# Altium PCB PCB1.PcbDoc
Units mm, origin at the board's own origin, x right, y up, seen from the top; angles counter-clockwise.
Board outline 43.6 x 30.7 mm, 2 copper layers (Top Copper, Bottom Copper), stack 1.335 mm thick; 21 components, 10 nets, 63 pads, 76 vias.
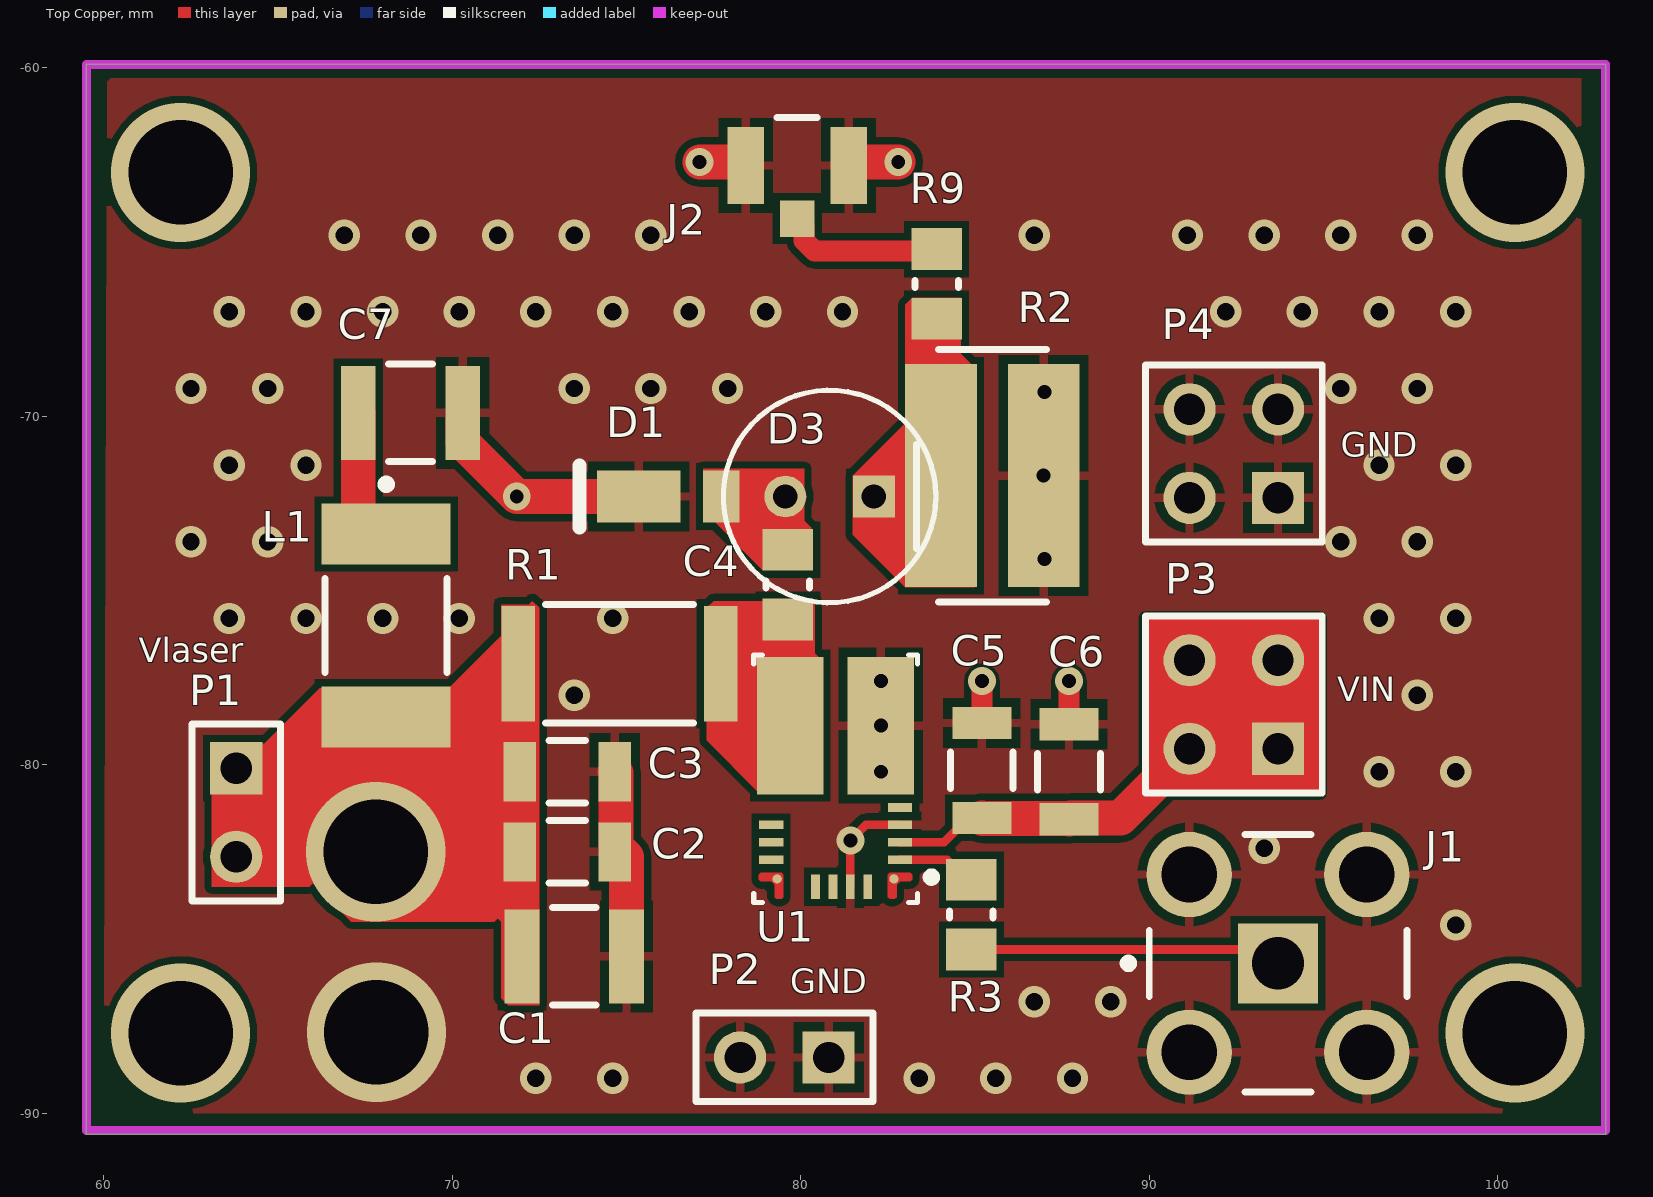
[diagram p0: Top Copper view]
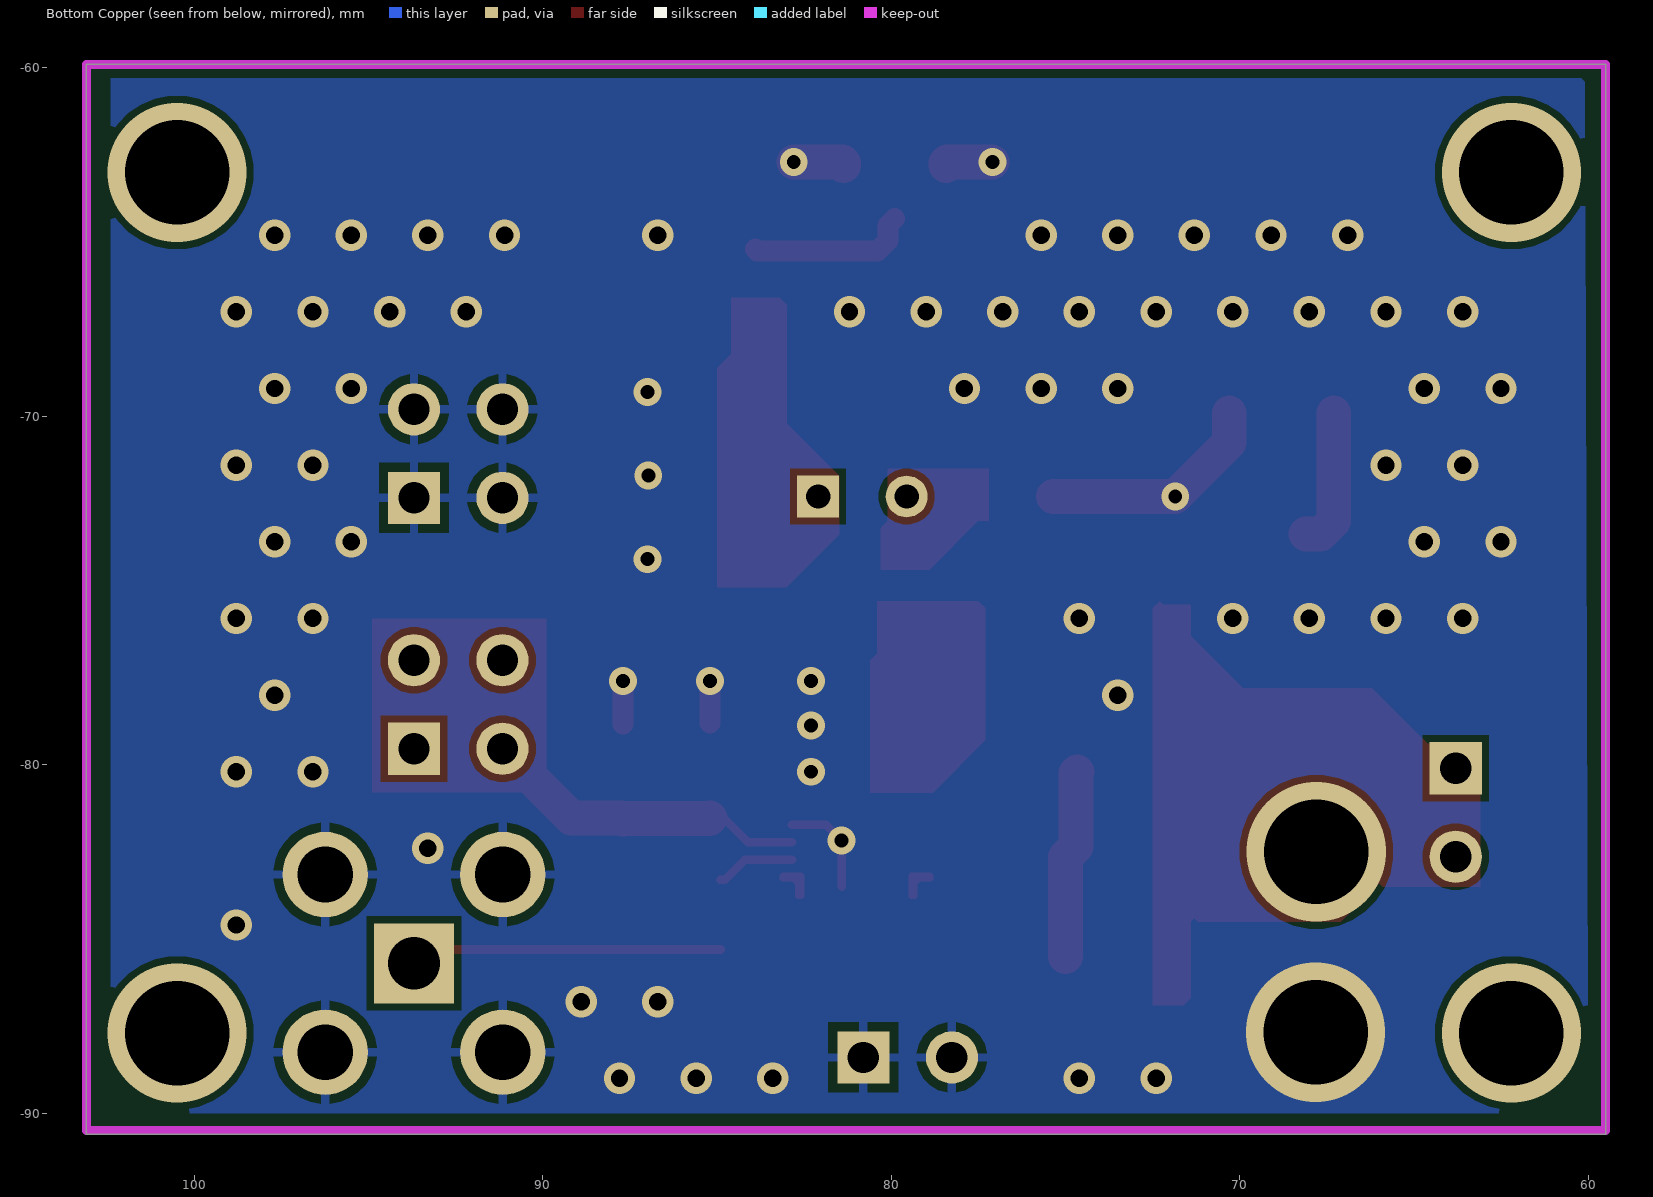
[diagram p1: Bottom Copper view, seen from below]

## Layer stack, top to bottom
Top Mask: solder mask 0.015, Solder Resist, Dk 3.8
Top Copper: signal copper 0.035
Core: core 1.265, FR-4, Dk 4.5
Bottom Copper: signal copper 0.035
Bottom Mask: solder mask 0.015, Solder Resist, Dk 3.8

## Board outline
59.5,-59.9 103.1,-59.9 103.1,-90.6 59.5,-90.6

## Design rules (kind name [scope] priority, off if disabled: settings)
Clearance Clearance_3 [InNamedPolygon('GND_L03_P003')] p1: gap=0.3 ignorepadtopadclearanceinfootprint=FALSE except(0.254: Arc-Text Arc-Hole Track-Text Track-Hole SMDPad-Text SMDPad-Hole THPad-THPad THPad-Via THPad-Text THPad-Hole Via-Via Via-Text Via-Hole Fill-Text Fill-Hole Poly-Text Poly-Hole Region-Text Region-Hole Text-Text Text-Hole)
Clearance 0.3 [InNamedPolygon('GND_L03_P002')] p2: gap=0.3 ignorepadtopadclearanceinfootprint=FALSE except(0.254: Arc-Via Arc-Text Arc-Hole Track-Via Track-Text Track-Hole SMDPad-Via SMDPad-Text SMDPad-Hole THPad-THPad THPad-Via THPad-Text THPad-Hole Via-Via Via-Text Via-Hole Fill-Text Fill-Hole Poly-Text Poly-Hole Region-Text Region-Hole Text-Text Text-Hole)
Clearance Clearance_2 [InNamedPolygon('GND_L04_P001')] p3: gap=0.3 ignorepadtopadclearanceinfootprint=FALSE except(0.254: Arc-Via Arc-Text Arc-Hole Track-Via Track-Text Track-Hole SMDPad-Via SMDPad-Text SMDPad-Hole THPad-THPad THPad-Via THPad-Text THPad-Hole Via-Via Via-Text Via-Hole Fill-Text Fill-Hole Poly-Text Poly-Hole Region-Text Region-Hole Text-Text Text-Hole)
Clearance Clearance_1 [InNamedPolygon('GND_L01_P000')] p4: gap=0.3 ignorepadtopadclearanceinfootprint=FALSE except(0.254: Arc-Via Arc-Text Arc-Hole Track-Via Track-Text Track-Hole SMDPad-Via SMDPad-Text SMDPad-Hole THPad-Via THPad-Text THPad-Hole Via-Via Via-Text Via-Hole Fill-Text Fill-Hole Poly-Text Poly-Hole Region-Text Region-Hole Text-Text Text-Hole)
Clearance [All] p5: gap=0.2 ignorepadtopadclearanceinfootprint=FALSE
ComponentClearance [All] p1 off: gap=0.254 collisioncheckmode=3 verticalgap=0.254 showdistances=FALSE
DiffPairsRouting [All] p1 off: maxlimit=0.254 minlimit=0.254 mostfreqgap=0.3 toplayer_minwidth=0.2 toplayer_maxwidth=0.5 toplayer_prefwidth=0.3 bottomlayer_minwidth=0.2 bottomlayer_maxwidth=0.5 bottomlayer_prefwidth=0.3 maxuncoupledlength=0.2
HoleSize [All] p1: absolutevalues=TRUE maxlimit=10 minlimit=0.3 maxpercent=80.000 minpercent=20.000
MinimumAnnularRing [All] p1: minimumring=0.19
MinimumSolderMaskSliver [All] p1: minsoldermaskwidth=0
PolygonConnect [HasFootprint('FP-LLL215-0_1-IPC_B')] p1: connectstyle=Direct reliefconductorwidth=0.254 reliefentries=4 polygonreliefangle="90 Angle" airgapwidth=0.254
PolygonConnect PolygonConnectGND2 [IsVia] p2: connectstyle=Direct reliefconductorwidth=0.254 reliefentries=4 polygonreliefangle="90 Angle" airgapwidth=0.254
PolygonConnect PolygonConnectGND [InNet('GND')] p3: connectstyle=Relief reliefconductorwidth=0.254 reliefentries=4 polygonreliefangle="90 Angle" airgapwidth=0.254
RoomDefinition Sheet1 [InComponentClass('Sheet1')] p1: confinementstyle=ConfineIn formatcopy=TRUE lockcomponents=FALSE outline 115.1,-108.8 124.9,-108.8 124.9,-103.7 115.1,-103.7
RoutingVias [All] p1: holewidth=0.5 width=0.9 viastyle="Through Hole" minholewidth=0.3 minwidth=0.6 maxholewidth=10 maxwidth=12
SilkToSilkClearance [All] p1: silktosilkclearance=0.1
SolderMaskExpansion [All] p1: expansion=0.102 istentingtop=FALSE
SupplyNets "Schematic Supply Nets_6" [InNet('GND')] p1: voltage=0.000
SupplyNets "Schematic Supply Nets_5" [InNet('Vin')] p2: voltage=0.000
SupplyNets "Schematic Supply Nets_4" [InNet('Vlaser1')] p3: voltage=0.000
Width [All] p1: maxlimit=10 minlimit=0.2 preferedwidth=0.6 toplayer_minwidth=0.25 toplayer_maxwidth=1 bottomlayer_prefwidth=0.3 minimp=50.000000 maximp=50.000000 favimp=50.000000
25 further rules are at their usual default settings.

## Components (designator, comment, footprint, x,y, rotation, side; value= is the part's Value field where it differs from the comment)
C1 "CC1210KKX7R9BB105" FP-CC1210-GA-MFG 73.5,-85.5 r0 top value=1uF
C2 "1 uF" FP-CL31B106KBHNNNE-MFG 73.3,-82.5 r180 top value=10uF
C3 "100 nF" FP-CL31B106KBHNNNE-MFG 73.3,-80.2 r180 top value=10uF
C4 "20nF" RESC2013X60X35ML10T20 79.63,-74.83 r270 top
C5 "10uF" FP-CL31B106KBHNNNE-MFG 85.2,-80.162 r270 top
C6 "1uF" FP-CL31B106KBHNNNE-MFG 87.7,-80.2 r270 top value=10uF
C7 "CC1210KKX7R9BB105" FP-CC1210-GA-MFG 68.8,-69.9 r180 top value=1uF
D1 "DFLS1100-7" DIOD-POWERDI123-2_V 76.2,-72.3 r180 top
D3 "Light-Emitting Diode" FP-DPGEW1S09H-MFG 80.83,-72.3 r180 top locked
J1 "RF2-04A-T-00-50-G" FP-RF2-04A-T-00-50-G-MFG 93.7,-85.7 r0 top
J2 "U.FL-R-SMT(10)" FP-U_FL-R-SMT_10-MFG 79.9,-62.8 r180 top
L1 "FBMH4532HM132-T" TAYO-FBMH4532-2_V 68.1,-76 r270 top
P1 "Header 2" HDR1X2 63.8,-80.1 r270 top
P2 "Header 2" HDR1X2 80.8,-88.4 r180 top
P3 "Header 2X2" HDR2X2 93.7,-79.54 r90 top
P4 "Header 2X2" HDR2X2 93.7,-72.34 r90 top
R1 "CRGP2512F390R" FP-CRGP2512-IPC_C 74.8,-77.1 r180 top value=390Ω
R2 "LTR100LJZPFSR015" FP-LTR100L-MFG 85.5,-71.7 r180 top
R3 "1K" RESC2013X60X35ML10T20 84.9,-84.3 r270 top
R9 "47" RESC2013X60X35ML10T20 83.9,-66.2 r90 top
U1 "XLMG3100R017VBER" VBE0015A-MFG 81,-80.4 r180 top

## Footprints (in the part's own frame and the unit in brackets; to place one, negate y for a bottom-side part, rotate by r counter-clockwise, add the part's x,y. Pads: shape width x height; smd on the part's side, far side on the other; paste and mask are expansions set on the pad)
DIOD-POWERDI123-2_V [mm] "SOD, 2-Leads, Body 2.8x1.78mm"
  rect 1.05x1.5 smd: 1(-1.525,0)
  rect 2.4x1.5 smd: 2(0.85,0)
  silkscreen extent 2.55,-0.89 2.55,0.89, body extent -1.4,-0.89 1.4,0.89, height 1.01
FP-CC1210-GA-MFG [mm]
  rect 1x2.7 smd paste+0 mask+0: 1(-1.5,0) 2(1.5,0)
  silkscreen extent -0.63,-1.4 0.63,1.4, body extent -2.2,-1.7 2.2,1.7, height 0.25
FP-CL31B106KBHNNNE-MFG [mm]
  rect 0.925x1.7 smd paste+0 mask+0: 1(-1.362,0) 2(1.363,0)
  silkscreen extent -0.53,-0.9 0.52,0.9, body extent -1.92,-1 1.92,1, height 0.25
FP-CRGP2512-IPC_C [mm]
  rect 0.958x3.306 smd paste+0 mask+0: 1(-2.902,0) 2(2.902,0)
  silkscreen extent -2.12,-1.7 2.12,1.7, body extent -3.48,-1.8 3.48,1.8, height 0.25
FP-DPGEW1S09H-MFG [mm]
  rect 1.2x1.2 hole 0.7 paste-2539.97 mask+0: 1(-1.27,0)
  round 1.2 hole 0.7 paste-2539.97 mask+0: 2(1.27,0)
  silkscreen extent -3.05,-3.05 3.05,3.05, body extent -3.15,-3.15 3.15,3.15, height 0.25
FP-LTR100L-MFG [mm]
  rect 2.06x6.4 smd paste+0 mask+0: 1(-1.475,0) 2(1.475,0)
  silkscreen extent -1.55,-3.62 1.55,3.62, body extent -2.61,-3.37 2.61,3.37, height 0.25
FP-RF2-04A-T-00-50-G-MFG [mm]
  rect 2.3x2.3 hole 1.5 paste-2539.97 mask+0: 1(0,0)
  round 2.45 hole 1.6 paste-2539.97 mask+0: 2(-2.55,2.55) 3(2.55,2.55) 4(-2.55,-2.55) 5(2.55,-2.55)
  silkscreen extent -4.42,-3.7 3.7,3.7, body extent -3.88,-3.88 3.88,3.88, height 0.25
FP-U_FL-R-SMT_10-MFG [mm]
  rect 1x1.05 smd paste-1000 mask+0: 1(0,1.525)
  rect 1.05x2.2 smd paste-1000 mask+0: 2(-1.475,0) 3(1.475,0)
  silkscreen extent -0.58,-1.38 0.58,-1.38, body extent -2.1,-1.48 2.1,2.15, height 0.25
HDR1X2 [mm] "Connector; Header; 2 Position"
  rect 1.5x1.5 hole 0.9: 1(0,0)
  round 1.5 hole 0.9: 2(2.54,0)
  silkscreen extent -1.27,-1.27 3.81,1.27
HDR2X2 [mm] "Connector; Header; 2x2 Position"
  rect 1.5x1.5 hole 0.9: 1(0,0)
  round 1.5 hole 0.9: 2(0,2.54) 3(2.54,0) 4(2.54,2.54)
  silkscreen extent -1.27,-1.27 3.81,3.81
RESC2013X60X35ML10T20 [mm] "Chip Resistor, 2-Leads, Body 2.1x1.35mm, IPC Low Density"
  rect 1.2x1.45 smd: 1(-1,0) 2(1,0)
  silkscreen extent -0.1,-0.62 0.1,0.62, body extent -1.05,-0.68 1.05,0.67, height 0.6
TAYO-FBMH4532-2_V [mm] "SMD, 2-Leads, Body 4.9x3.5mm, Height 3.5mm"
  rect 1.75x3.7 smd: 1(-2.625,0) 2(2.625,0)
  silkscreen extent -4.17,-1.75 1.35,1.75, body extent -2.45,-1.75 2.45,1.75, height 3.5
VBE0015A-MFG [mm]
  round 0.265 smd paste+0 mask-0.114: 1(-1.675,2.875) 11(1.675,2.875)
  rect 0.7x0.25 smd paste+0 mask-0.343: 2(-1.85,2.325) 3(-1.85,1.825) 4(-1.85,1.325) 5(-1.85,0.825) 8(1.85,1.325) 9(1.85,1.825) 10(1.85,2.325)
  rect 1.9x3.95 smd paste-1.962 mask-1.968: 6(-1.3,-1.525) 7(1.3,-1.525)
  rect 0.25x0.7 smd paste+0 mask-0.343: 12(0.575,3.1) 13(0.075,3.1) 14(-0.425,3.1) 15(-0.925,3.1)
  Top Copper region: 1.55,2.7 2.15,2.7 2.2,2.75 2.2,2.9 2.15,2.95 1.85,2.95 1.75,3.05 1.75,3.4 1.7,3.45 1.55,3.45 1.5,3.4 1.5,2.75
  Top Copper region: -1.55,2.7 -2.15,2.7 -2.2,2.75 -2.2,2.9 -2.15,2.95 -1.85,2.95 -1.75,3.05 -1.75,3.4 -1.7,3.45 -1.55,3.45 -1.5,3.4 -1.5,2.75
  silkscreen extent -2.88,-3.55 2.35,3.55

## Part data
C1 C7: library part CMP-03422-000918-1, "CAP CER 1UF 50V X7R 1210", Capacitance=1uF, Manufacturer=Yageo, Package=CC1210-GA, Temperature="-55°C to +125°C", Temperature Characteristic=X7R, Temperature Coefficient=15%, Temperature Range High=+125°C, Temperature Range Low=-55°C, Tolerance=10%, Voltage Rating=50V, Automotive=No, Category=Cap, ComponentLink2Description=Datasheet, ComponentLink2URL=http://www.yageo.com/documents/recent/UPY-GPHC_X7R_6.3V-to-50V_18.pdf, Device Class L1="Passive Components", Device Class L2=Capacitors, Device Class L3="Ceramic Capacitors", Digikey Description="CAP CER 1UF 50V X7R 1210", Footprint Url=http://www.yageo.com/exep/pages/download/literatures/UPY-C_GEN_24.pdf, Height=1.45mm, Ipc Land Pattern Name=CAPC320250X125, Lead Free=Yes, Manufacturer Part Number=CC1210KKX7R9BB105, Material=Ceramic, Mouser Description="1210 1 uF 50 V ±10 % Tolerance X7R SMT Multilayer Ceramic Capacitor", Octopart=https://octopart.com/cc1210kkx7r9bb105-yageo-22054290, RoHS=TRUE
C2 C3 C6: library part CMP-2000-07530-2, "CAP CER 10UF 50V X7R 1206", Capacitance=10uF, Manufacturer=Samsung, Manufacturer Part Number=CL31B106KBHNNNE, Temperature="-55°C to +125°C", Temperature Characteristic=X7R, Temperature Coefficient=15%, Temperature Range High=+125°C, Temperature Range Low=-55°C, Tolerance=10%, Voltage Rating=50V, Automotive=No, Category=Cap, ComponentLink2Description=Datasheet, ComponentLink2URL=http://www.samsungsem.com/global/front/downloadcms.do?path=%2F%2Fglobal%2F%2Fsupport%2F%2Fproduct-search%2F%2Fmlcc%2F%2F__icsFiles%2F%2Fafieldfile%2F%2F2019%2F%2F06%2F%2F18&fileName=CL31B106KBHNNNE-19.pdf, Device Class L1="Passive Components", Device Class L2=Capacitors, Device Class L3="Ceramic Capacitors", Digikey Description="CAP CER 10UF 50V X7R 1206", Height=1.8mm, Lead Free=Yes, Material=Ceramic, Octopart=https://octopart.com/cl31b106kbhnnne-samsung-30507377, Package=CL31B106KBHNNNE, RoHS=TRUE
C4: library part CC0805, "Chip capacitor", Voltage=50V, Series=X7R
C5: library part CMP-2000-07530-2, "CAP CER 10UF 50V X7R 1206", Manufacturer=Samsung, Manufacturer Part Number=CL31B106KBHNNNE, Temperature="-55°C to +125°C", Temperature Characteristic=X7R, Temperature Coefficient=15%, Temperature Range High=+125°C, Temperature Range Low=-55°C, Tolerance=10%, Voltage Rating=50V, Automotive=No, Capacitance=10uF, Category=Cap, ComponentLink2Description=Datasheet, ComponentLink2URL=http://www.samsungsem.com/global/front/downloadcms.do?path=%2F%2Fglobal%2F%2Fsupport%2F%2Fproduct-search%2F%2Fmlcc%2F%2F__icsFiles%2F%2Fafieldfile%2F%2F2019%2F%2F06%2F%2F18&fileName=CL31B106KBHNNNE-19.pdf, Device Class L1="Passive Components", Device Class L2=Capacitors, Device Class L3="Ceramic Capacitors", Digikey Description="CAP CER 10UF 50V X7R 1206", Height=1.8mm, Lead Free=Yes, Material=Ceramic, Octopart=https://octopart.com/cl31b106kbhnnne-samsung-30507377, Package=CL31B106KBHNNNE, RoHS=TRUE
D1: library part CMP-2000-05099-1, "1 A High Voltage Schottky Barrier Rectifier, 0.62 V, -55 to 175 degC, 2- Pin POWERDI123, Pb-Free, Tape and Reel", Average Rectified Current-Max=1A, Forward Voltage=0.77V, Manufacturer="Diodes Inc", Peak Current-Max=40A, Reverse Current-Max=1µA, Reverse Voltage-Max [Vrrm]=100V, Datasheet URL=https://datasheet.ciiva.com/15144/getdatasheetpartid-44146-15144126.pdf, Datasheet Version=Sep-14, Manufacturer URL=http://www.diodes.com/
D3: library part LED, AF=1, BV=0, BV_MAX=1e99, CJO=0, CJP=0, CTA=0, CTP=0, EG=1.11, FC=0.5, FCS=0.5, FV_MAX=1e99, IBV=0.001, IKF=0, IKR=0, IS=1e-14, ISR=1e-14, JSW=0, JTUN=0, JTUNSW=0, KEG=1, KF=0, LEVEL=1, MJSW=0.33, N=1, NBV=1, NR=1, NS=1, NTUN=30, PHP=1, RS=0, SimulationGenericComponent=True, TCV=0, TLEV=0, TLEVC=0, TM1=0, TM2=0, TNOM=27, TPB=0, TPHP=0, TRS=0, TRS2=0, TT=0, TTT1=0, TTT2=0, VJ=1, XTI=3, XTITUN=3
J1: library part CMP-42753-000002-1, "CONN SMA JACK STR 50 OHM PCB"
J2: library part CMP-0029-00003-2, "CONN U.FL RCPT STR 50 OHM SMD", Case/Package=SMD/SMT, Dielectric Material=Polymer, Frequency=6GHz, Housing Color=Beige, Max Operating Temperature=90°C, Min Operating Temperature=-40°C, Package Quantity=1, Body Material=Bronze, Body Plating=Silver, Connector Type=Coaxial, Contact Material=Brass, Contact Plating=Gold, Depth=3.1mm, Fastening Type=Snap, Impedance=50R, Lead Free="Lead Free", Length=3mm, Max Frequency=6GHz, Mount="Surface Mount", Orientation=Vertical, Packaging="Tape and Reel", Plating=Silver, Radiation Hardening=No, Termination=Solder
L1: library part CMP-1526-00002-2, "None", Case Code (Imperial)=1812, Case Code (Metric)=4532, Current Rating=3A, DC Resistance (DCR)=60mR, Frequency=100MHz, Max Operating Temperature=125°C, Min Operating Temperature=-40°C, Package Quantity=2000, Resistor Type="Ferrite Bead", Tolerance=25%, Case/Package=1812, Core Material=Ferrite, Depth=3.5mm, Halogen Free="Halogen Free", Height=3.2mm, Impedance=1.3kR, Lead Free="Lead Free", Length=4.5mm, Material=Ferrite, Max Current Rating=3A, Max DC Current=3A, Number of Lines=1, Number of Pins=2, Packaging="Tape and Reel", RoHS Compliant=Yes, Series=FB, Shielding=Unshielded, Termination=SMD/SMT, Test Frequency=100MHz, Width=3.2mm
P1 P2: "Header, 2-Pin", LatestRevisionDate=17-Jul-2002, LatestRevisionNote="Re-released for DXP Platform.", Publisher="Altium Limited"
P3 P4: "Header, 2-Pin, Dual row", LatestRevisionDate=17-Jul-2002, LatestRevisionNote="Re-released for DXP Platform.", Publisher="Altium Limited"
R1: library part CMP-03211-008956-1, "CRGP 2512 390R 1%", Ambient Temperature Range High=+70°C, Manufacturer=TE, Package=CRGP2512, Power rating=2W, Resistance=390Ω, Temperature="-55°C to +155°C", Temperature Coefficient=±100ppm/°C, Temperature Range High=+155°C, Temperature Range Low=-55°C, Tolerance=0.01, Voltage Rating=500V, Automotive=No, Category=Res, ComponentLink2Description=Datasheet, ComponentLink2URL=https://www.mouser.ca/datasheet/2/418/NG_DS_9-1773463-9_A-1358566.pdf, Composition="Thick Film", Device Class L1="Passive Components", Device Class L2=Resistors, Device Class L3="Chip SMD Resistors", Digikey Description="CRGP 2512 390R 1%", Height=0.65mm, Ipc Land Pattern Name=RESC635320X55, Lead Free=Yes, Manufacturer Part Number=CRGP2512F390R, Octopart=https://octopart.com/crgp2512f390r-te+connectivity-91019061, RoHS=TRUE, Series=CRGP
R2: library part CMP-00574-123977801-1, "LTR100LJZPFSR015 Res 0.015 Ohm 1% 4W 2512 Wide", Case/Package=2512, Max Operating Temperature=155°C, Min Operating Temperature=-65°C, Power rating=4W, Resistance=15mΩ, Tolerance=1%, Composition="Thick Film", Height=730µm, NexarPartId=123977801
R3 R9: library part RC0805, "Chip resistor", Tolerance=5%
U1: "No Description Available", Mfr_Name="Texas Instruments", RefDes=RefDes, TYPE=TYPE

## Via types
v1: diameter 0.9, hole 0.5, Top Copper to Bottom Copper, tented both sides, 58 vias
v2: diameter 0.8, hole 0.4, Top Copper to Bottom Copper, tented both sides, 12 vias
v3: diameter 4, hole 3, Top Copper to Bottom Copper, 6 vias

## Nets (pads, with @x,y where several pads share a name; then routed paths per layer and width w, separated by ;. In a path a pad name is that pad's centre, name@x,y a point inside that pad or via, vN(x,y) a via of type N, cw(c..) or ccw(c..) an arc to the next point about the centre after c; other vN are vias at no path point)
GND: C1.2 C2.1 C3.1 C5.1 C6.1 C7.1 D1.2 J1.2 J1.3 J1.4 J1.5 J2.2 J2.3 P2.1 P2.2 P4.1 P4.2 P4.3 P4.4 R2.1 U1.4 U1.6 U1.14 | length 20.3
  Top Copper w0.25: U1.14 v2(81.425,-82.175) 81.875,-81.725 U1.4
  Top Copper w0.6: C5.1 v2(85.2,-77.6) ; C6.1 v2(87.7,-77.6)
  Top Copper w1: C7.1 70.3,-70.75 v2(71.85,-72.3) D1.2 ; C3.1 74.7,-80.237 74.7,-82.35 75,-82.65 C1.2 ; v2(77.1,-62.7) 78.4,-62.7 78.425,-62.725 J2.3 ; J2.2 81.375,-62.725 81.4,-62.7 v2(82.8,-62.7)
  other v1: 72.4,-89 74.6,-89 83.4,-89 85.6,-89 87.8,-89 86.7,-86.8 88.9,-86.8 98.8,-84.6 93.3,-82.4 96.6,-80.2 98.8,-80.2 73.5,-78 97.7,-78 63.6,-75.8 65.8,-75.8 68,-75.8 70.2,-75.8 74.6,-75.8 96.6,-75.8 98.8,-75.8 62.5,-73.6 64.7,-73.6 95.5,-73.6 97.7,-73.6 63.6,-71.4 65.8,-71.4 96.6,-71.4 98.8,-71.4 62.5,-69.2 64.7,-69.2 73.5,-69.2 75.7,-69.2 77.9,-69.2 95.5,-69.2 97.7,-69.2 63.6,-67 65.8,-67 68,-67 70.2,-67 72.4,-67 74.6,-67 76.8,-67 79,-67 81.2,-67 92.2,-67 94.4,-67 96.6,-67 98.8,-67 66.9,-64.8 69.1,-64.8 71.3,-64.8 73.5,-64.8 75.7,-64.8 86.7,-64.8 91.1,-64.8 93.3,-64.8 95.5,-64.8 97.7,-64.8
  other v2: 82.3,-80.2 82.3,-78.875 82.3,-77.6 87,-74.1 86.975,-71.7 87,-69.3
  other v3: 67.823,-87.676
LASER_DAC: J1.1 R3.2 | length 9
  Top Copper w0.25: R3.2 93.3,-85.3 J1.1
NetC4_1: C4.1 D1.1 D3.2
NetC4_2: C4.2 R1.1 U1.7
NetC7_2: C7.2 L1.1 | length 4.1
  Top Copper w1: C7.2 67.3,-73 67.675,-73.375 L1.1
NetD3_1: D3.1 R2.2 R9.1
NetJ2_1: J2.1 R9.2 | length 4.7
  Top Copper w0.6: J2.1 80.1,-64.525 80.1,-64.949 80.399,-65.248 83.852,-65.248 R9.2
NetR3_1: R3.1 U1.2 | length 2.3
  Top Copper w0.25: U1.2 84.2,-82.725 84.775,-83.3 R3.1
VIN: C5.2 C6.2 P3.1 P3.2 P3.3 P3.4 U1.3 | length 9.5
  Top Copper w0.25: U1.3 84.112,-82.225 84.812,-81.525 C5.2
  Top Copper w1: C5.2 85.219,-81.544 87.681,-81.544 C6.2 87.738,-81.525 89.175,-81.525 P3.2
Vlaser1: C1.1 C2.2 C3.2 L1.2 P1.1 P1.2 R1.2 | length 8.4
  Top Copper w1: R1.2 71.898,-84.548 72,-84.65 C1.1
  other v3: 67.8,-82.5
pads on no net: U1.1 U1.5 U1.8 U1.9 U1.10 U1.11 U1.12 U1.13 U1.15
copper on no net:
  other v3: 62.2,-87.7 100.5,-87.7 62.2,-63 100.5,-63

## Polygon pours and split planes (outlines as drawn)
GND on Top Copper "NONET_L-01_P-001" (solid, remove dead copper, pour order 1): 60.1,-60.4 60.2,-60.3 102.4,-60.3 102.4,-89.9 102.5,-90 60,-90
GND on Bottom Copper "NONET_L-01_P-001" (solid, remove dead copper, pour order 0): 60.1,-60.4 60.2,-60.3 102.4,-60.3 102.4,-89.9 102.5,-90 60,-90

## Keep-outs
Keep-Out Layer:
  lines w0.254: 59.5,-90.5 103.1,-90.5 103.1,-59.9 59.5,-59.9 59.5,-90.5

## Other copper
Top Copper:
  rectangle net VIN: 89.9,-80.8 94.9,-75.8
  region net Vlaser1: 63.1,-79.4 64.6,-79.4 66.2,-77.8 69.9,-77.8 71.4,-76.3 71.4,-75.4 72.2,-75.4 72.3,-75.3 72.5,-75.5 72.5,-86.9 71.6,-86.9 71.4,-86.7 71.4,-84.5 71.3,-84.4 71.2,-84.5 67.1,-84.5 66,-83.4 65.9,-83.5 63.1,-83.5
  region net NetC4_2: 77.5,-75.3 77.3,-75.5 77.3,-79.3 78.8,-80.8 80.6,-80.8 80.6,-77 80.4,-76.8 80.4,-75.3
  region net NetC4_1: 77.2,-73 77.5,-73 78.9,-74.4 80.3,-74.4 80.3,-73.2 80.1,-73 80.1,-71.5 77.2,-71.5
  region net NetD3_1: 83.2,-66.6 83,-66.8 83,-70.2 81.5,-71.7 81.5,-73.4 83,-74.9 85,-74.9 85,-68.6 84.6,-68.2 84.6,-66.6

## Silkscreen, mask and mechanical layers (free items; w line width, h text height)
Top Overlay:
  text "GND" at 95.5,-71.387 h1.2
  text "Vlaser" at 61.001,-77.288 h1.2
  text "VIN" at 95.401,-78.4 h1.2
  text "GND" at 79.7,-86.787 h1.2
Drill Guide:
  text "String" at 79.854,-94.638 h1.52